# EAGLE board UpTo11.FrontPanel (EAGLE 7.6.0)

Size 68 x 58 mm. Coordinates in mm from the lower left corner, seen from the top.
Outline: 0,0.09 68,0 68,58 0,58 0,0.09
Copper layers (1*16): Top 0.035mm / dielectric 1.5mm / Bottom 0.035mm
Design rules "default": minimum track width 10mil, minimum drill 24mil, track to track 8mil, track to pad 8mil, pad to pad 8mil, via to via 8mil, smd to smd 8mil, copper to edge 40mil, drill to drill 8mil, minimum pad ring 10mil, minimum via ring 8mil, stop-mask expansion 4mil, vias tented up to drill 0mil, thermal gap 10mil
Net classes: 0 default: clearance 0.205 mm
Holes 7 mm at 24,27.5
Milling: area 15.5,26 to 16.7,28.6

## Footprints (pad centres in the part's own frame; a part is rotated, then mirrored left to right if it is on the bottom)
LED5MM = drill 0.813 pad 1.676 octagon: A -1.27,0; K 1.27,0
1X06 = drill 1.016 octagon: 1 -6.35,0; 2 -3.81,0; 3 -1.27,0; 4 1.27,0; 5 3.81,0; 6 6.35,0
SOLDERJUMPER_REFLOW = smd 1.168 x 1.6: 1 -0.762,0; 2 0.762,0
1206 = smd 1.6 x 1.803: A -1.422,0; C 1.422,0

## Placement (x,y rotation side)
FLASH_LED  [LED5MM]  56.19,39.21 0 top
FRONT_PANEL_INTERFACE  [1X06]  33,2.5 180 top
POT_GND_(LEFT)  [SOLDERJUMPER_REFLOW]  23,8 270 bottom
POT_IN_(MIDDLE)  [SOLDERJUMPER_REFLOW]  15,8 270 bottom
POT_OUT_(RIGHT)  [SOLDERJUMPER_REFLOW]  6,8 270 bottom
POWER  [1206]  61,11 0 top

## Library data of the parts
FLASH_LED FRONT_PANEL_INTERFACE POWER = adafruit
POT_GND_(LEFT) POT_IN_(MIDDLE) POT_OUT_(RIGHT) = microbuilder

## Nets
GND_EX: FLASH_LED.K FRONT_PANEL_INTERFACE.1 POT_GND_(LEFT).2 POWER.C
LED_FLASH: FLASH_LED.A FRONT_PANEL_INTERFACE.4
LED_PWR: FRONT_PANEL_INTERFACE.3 POWER.A
POT_IN: FRONT_PANEL_INTERFACE.5 POT_IN_(MIDDLE).2
POT_OUT: FRONT_PANEL_INTERFACE.6 POT_OUT_(RIGHT).2
VCC: FRONT_PANEL_INTERFACE.2

## Tracks (layer width: path | path; a pad name or v marks a point on that pad's centre or on a via)
GND_EX  (3 unrouted)
LED_FLASH  (1 unrouted)
LED_PWR  (1 unrouted)
POT_IN  (1 unrouted)
POT_OUT  (1 unrouted)

## Text on the board
tPlace: C:/DVT/MadeInTheUSB.PCB/EXTENSIONS/Analog/UpTo11/FrontPanel/Amplifier Legend to 11.mask.bmp
tNames: Up To 11 | 6 | 4 | 8 | 2 | 10 | 0 | 11
bNames: Up To 11 - Front Panel | https://bit.ly/2Pm6jPo | PCBv1 - 2019.12 | www.FredericTorres.com | MadeInTheUSB.net | POT_OUT | LED_FLASH | LED_PWR | POT_IN | VCC | GND